# Altium PCB PCB1.PcbDoc
Units mm, origin at the board's own origin, x right, y up, seen from the top; angles counter-clockwise.
Board outline 50 x 35 mm, 4 copper layers (Top Layer, Internal Plane 1, Internal Plane 2, Bottom Layer), stack 1.07 mm thick; 19 components, 15 nets, 55 pads, 0 vias.
Unrouted connection lines stored in the file: 1.
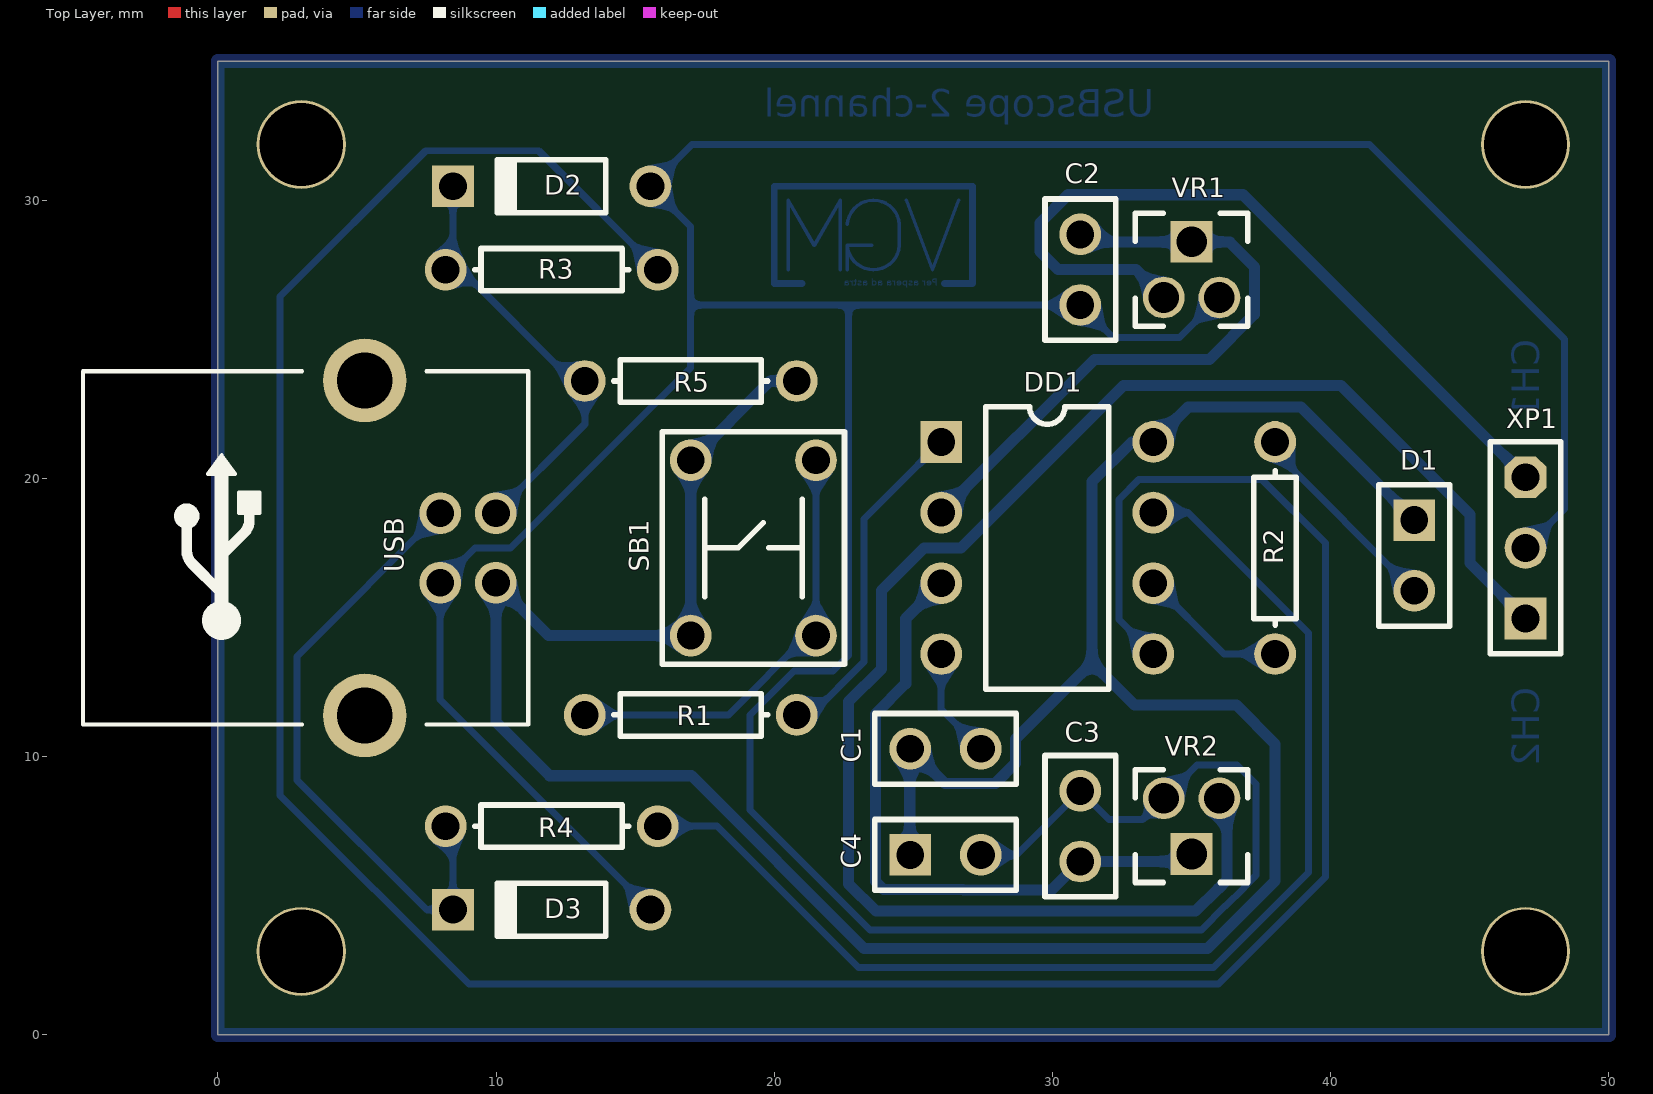
[diagram p0: Top Layer view]
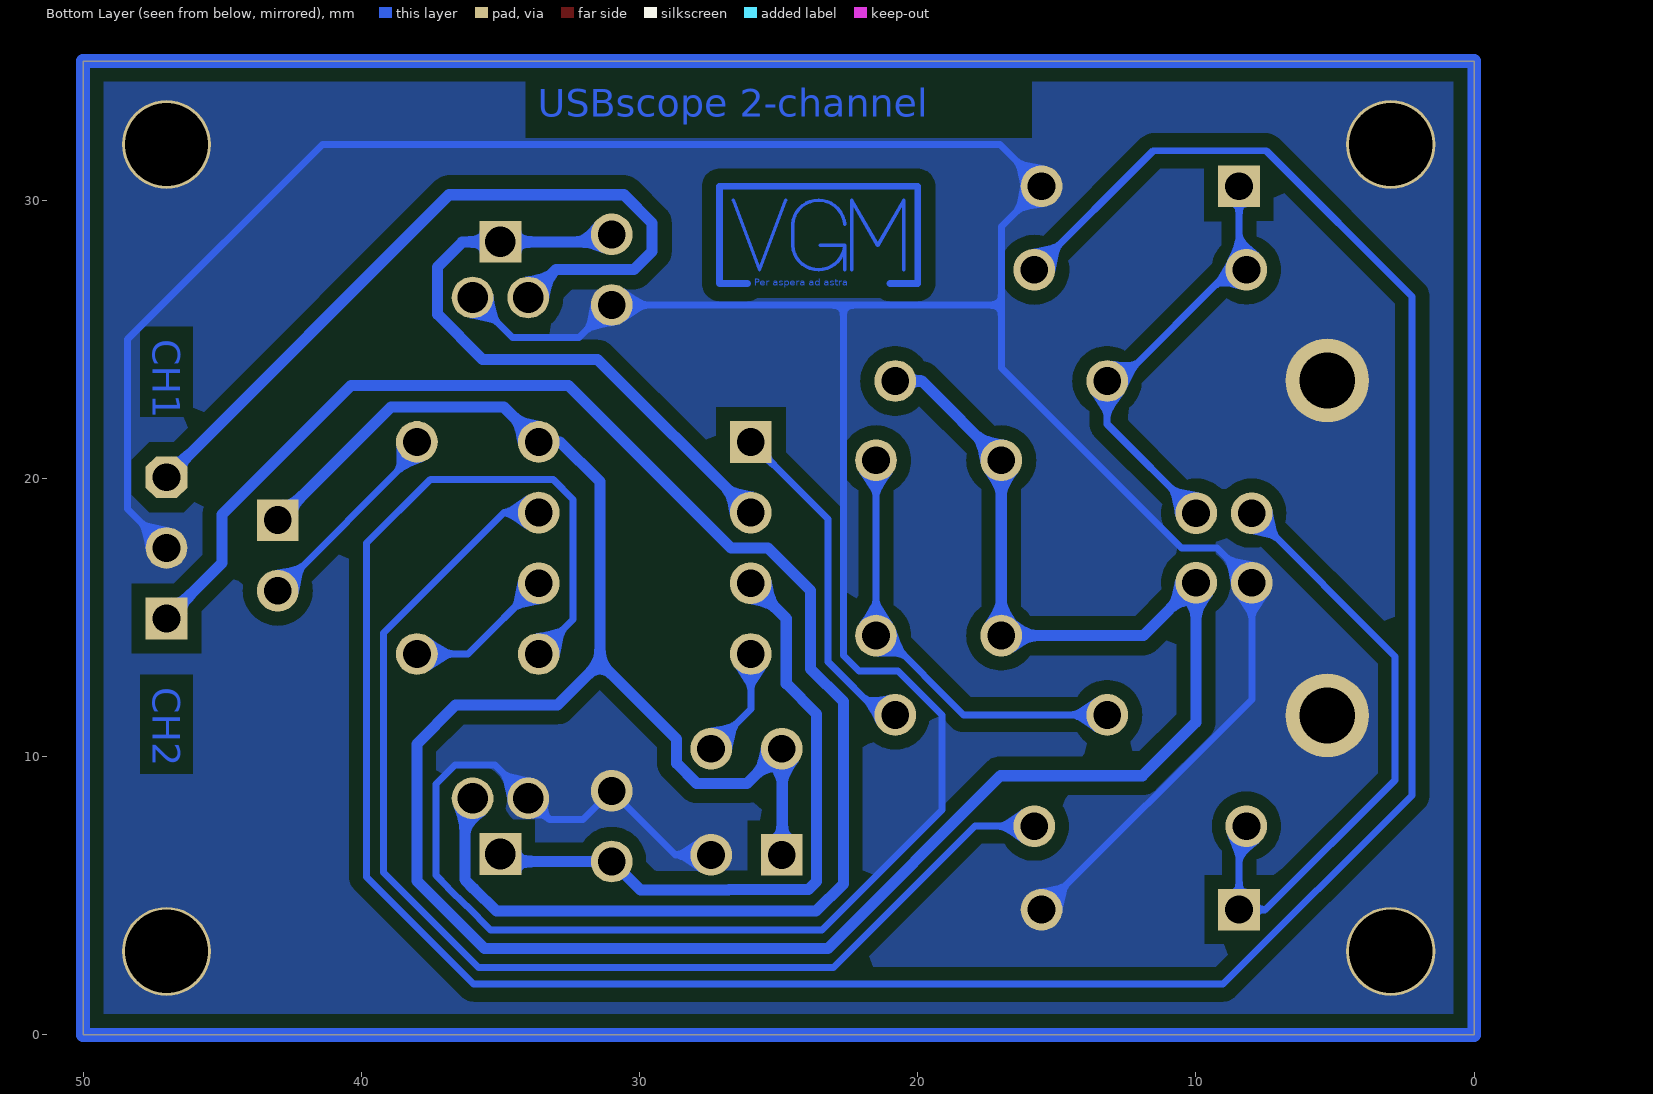
[diagram p1: Bottom Layer view, seen from below]
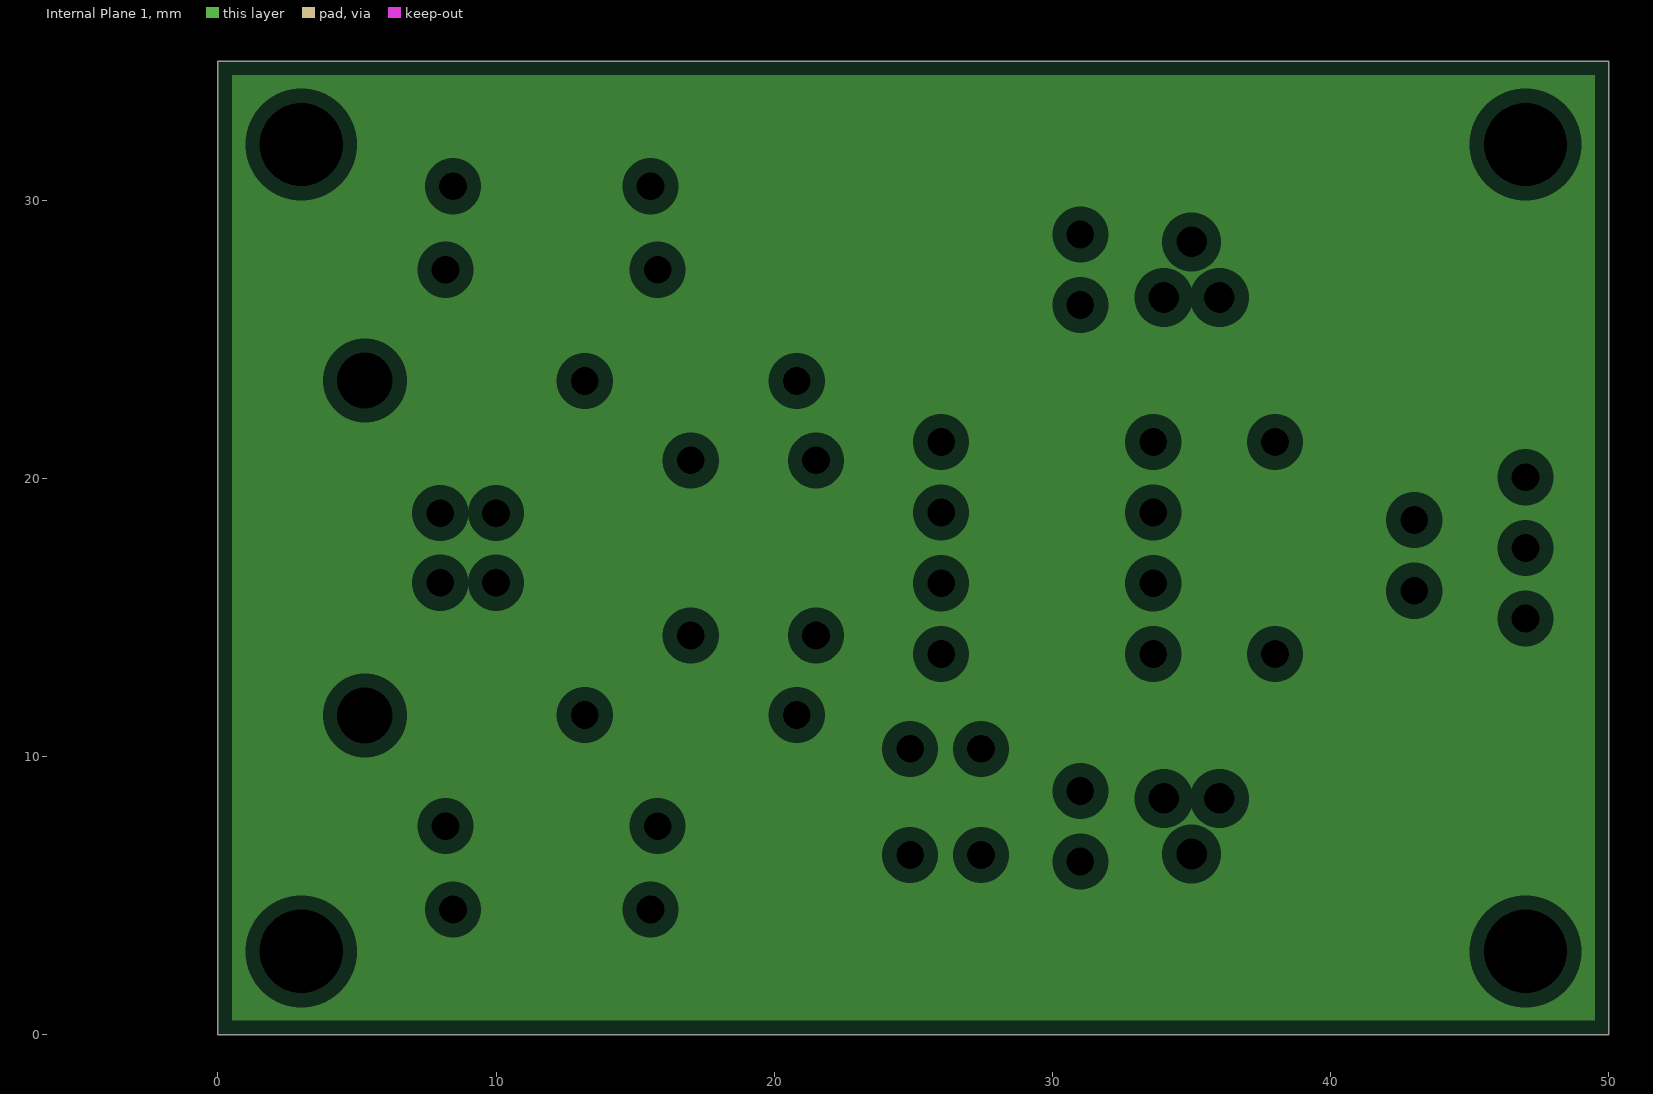
[diagram p2: Internal Plane 1, clearances drawn from the general rule]
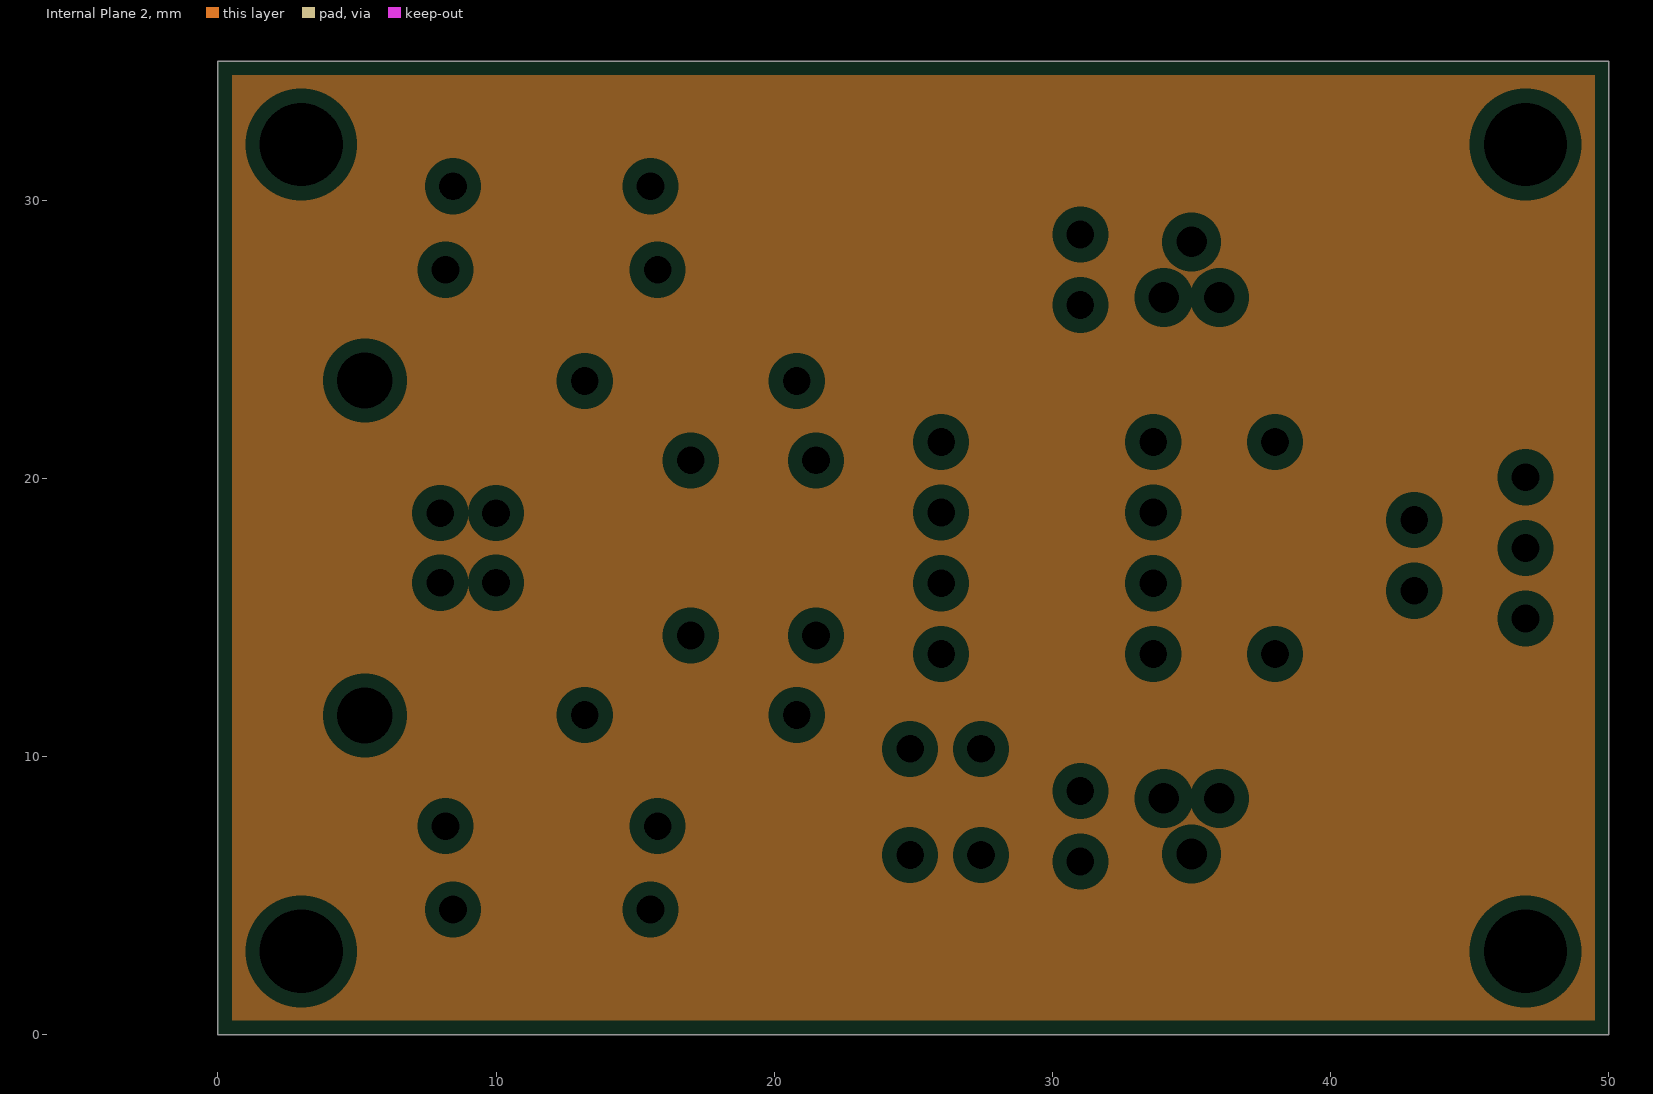
[diagram p3: Internal Plane 2, clearances drawn from the general rule]

## Layer stack, top to bottom
Top Solder: solder mask 0.01, Solder Resist, Dk 3.5
Top Layer: signal copper 0.035
Internal Plane 1: plane copper (thickness not stored)
Internal Plane 2: plane copper (thickness not stored)
Dielectric 1: dielectric 1, FR-4, Dk 4.8
Bottom Layer: signal copper 0.035
Bottom Solder: solder mask 0.1, Solder Resist, Dk 3.5

## Board outline
0,0 0,35 50,35 50,0

## Design rules (kind name [scope] priority, off if disabled: settings)
Clearance [All] p1: gap=0.3 except(0.5: Poly-Poly SMDPad-Poly Track-Poly Via-Poly Arc-Poly Fill-Poly THPad-Poly)
PlaneClearance [All] p1: clearance=0.508
PlaneConnect [All] p1: planeconnectstyle=Relief reliefexpansion=0.508 reliefentries=4 reliefconductorwidth=0.254 reliefairgap=0.254
PolygonConnect [All] p1: connectstyle=Direct reliefconductorwidth=0.254 reliefentries=4 polygonreliefangle="90 Angle" airgapwidth=0.254
RoutingTopology [All] p1: topology=Horizontal
RoutingVias [All] p1: holewidth=1 width=1.5 viastyle="Through Hole" minholewidth=0.711 minwidth=1.27 maxholewidth=0.711 maxwidth=1.27
SolderMaskExpansion [All] p1: expansion=0.102
UnpouredPolygon [All] p1: allowunpoured=FALSE
Width WidthFat [(InNet('NetVR1_1') OR InNet('NetC2_2') OR InNet('NetC3_2') OR InNet('NetVR2_1')  OR InNet('NetC1_2'))] p1: maxlimit=0.4 minlimit=0.4 preferedwidth=0.4
Width [All] p2: maxlimit=0.5 minlimit=0.25 preferedwidth=0.25 minimp=50.000000 maximp=50.000000 favimp=50.000000
26 further rules are at their usual default settings.

## Classes and differential pairs
component class schematic: C1 C2 C3 C4 D1 D2 D3 DD1 R1 R2 R3 R4 R5 SB1 USB VR1 VR2 XP1

## Components (designator, comment, footprint, x,y, rotation, side; value= is the part's Value field where it differs from the comment)
C1 "100nF" RAD-0.1 26.155,10.28 r180 top
C2 "100nF" RAD-0.1 31,27.5 r90 top
C3 "100nF" RAD-0.1 31,7.5 r270 top
C4 "47uF x 16V" HDR1X2 24.885,6.47 r0 top
D1 "" HDR1X2 43,18.5 r270 top
D2 "Zener" DO-35 12,30.5 r180 top
D3 "Zener" DO-35 12,4.5 r180 top
DD1 "ATtiny85" DIP-8-300 26,21.31 r0 top
R1 "10K" AXIAL-0.3 17,11.5 r180 top
R2 "270" AXIAL-0.3 38,17.5 r90 top
R3 "68" AXIAL-0.3 12,27.5 r180 top
R4 "68" AXIAL-0.3 12,7.5 r180 top
R5 "1K5" AXIAL-0.3 17,23.5 r0 top
SB1 "Button TACT-64K" "BUTTON TACT-64K" 17,14.35 r90 top
USB "USB_TypeB" USB_TypeB 9,17.5 r90 top
VR1 "Potentiometer" POTENTIOMETER 34,26.5 r0 top
VR2 "Potentiometer" POTENTIOMETER 36,8.5 r180 top
XP1 "WF-03R" HDR1X3 47,20.04 r270 top
? "" "LOGO small" 27.125,27 r180 bottom

## Footprints (in the part's own frame and the unit in brackets; to place one, negate y for a bottom-side part, rotate by r counter-clockwise, add the part's x,y. Pads: shape width x height; smd on the part's side, far side on the other; paste and mask are expansions set on the pad)
AXIAL-0.3 [mm] "Axial Device, Thru-Hole; 2 Leads; 0.3 in Pin Spacing"
  round 1.5 hole 1: 1(-3.81,0) 2(3.81,0)
  silkscreen extent -2.77,-0.76 2.77,0.76
"BUTTON TACT-64K" [mm] "My standart switch button"
  round 1.5 hole 1: 1(0,0) 2(6.3,0) 3(0,-4.5) 4(6.3,-4.5)
  silkscreen extent -1.02,-5.53 7.32,1.02, body extent -0.1,-5.25 6.4,0.75, height 4.3
DIP-8-300 [mm]
  rect 1.5x1.5 hole 1: 1(0,0)
  round 1.5 hole 1: 2(0,-2.54) 3(0,-5.08) 4(0,-7.62) 5(7.62,-7.62) 6(7.62,-5.08) 7(7.62,-2.54) 8(7.62,0)
  silkscreen extent 1.6,-8.89 6.02,1.27, body extent -0.13,-8.44 7.75,0.82, height 4
DO-35 [mm] "Diode, Axial; Body 3.8 x 1.9 mm (LxDia. max), Lead Dia. 0.53 mm (max)"
  round 1.5 hole 1: 1(-3.55,0)
  rect 1.5x1.5 hole 1: 2(3.55,0)
  silkscreen extent -1.95,-0.95 2.05,0.95
HDR1X2 [mm] "Connector; Header; 2 Position"
  rect 1.5x1.5 hole 1: 1(0,0)
  round 1.5 hole 1: 2(2.54,0)
  silkscreen extent -1.27,-1.27 3.81,1.27
HDR1X3 [mm] "Connector; Header; 3 Position"
  oct 1.5x1.5 hole 1: 1(0,0)
  round 1.5 hole 1: 2(2.54,0)
  rect 1.5x1.5 hole 1: 3(5.08,0)
  silkscreen extent -1.27,-1.27 6.35,1.27
"LOGO small" [mm] "My logo (7.125x3.5)"
  Top Layer lines w0.125: 6.625,0.5 6.625,3 5.688,1.375 4.75,3 4.75,0.5 ; 4.5,0.5 4.5,1.375 ; 4.5,2.125 ccw(c3.563,2.06) 2.625,2.125 2.625,1.375 ccw(c3.563,1.44) 4.5,1.375 ; 3.625,1.375 4.5,1.375 ; 2.375,3 1.438,0.5 0.5,3
  Top Layer lines w0.25: 6.125,0 7.125,0 7.125,3.5 0,3.5 0,0 1,0
POTENTIOMETER [mm] "Variable Resistor"
  round 1.5 hole 1.1: 1(0,0) 3(2,0)
  rect 1.5x1.5 hole 1.1: 2(1,2)
  silkscreen extent -1.02,-1.02 3.03,3.03, body extent -0.98,-1 3,3, height 4.2
RAD-0.1 [mm] "Radial Cap, Thru-Hole; 2 Leads; 0.1 in Pin Spacing"
  round 1.5 hole 1: 1(-1.27,0) 2(1.27,0)
  silkscreen extent -2.54,-1.27 2.54,1.27
USB_TypeB [mm]
  round 1.5 hole 1 mask+0.025: 1(-1.25,-0.995) 2(1.25,-0.995) 3(1.25,1.005) 4(-1.25,1.005)
  round 3 hole 2 mask+0: ""(-6.02,3.715) ""(6.02,3.715)
  silkscreen extent -6.35,-2.16 6.35,13.84, body extent -7.19,-1.7 7.19,14, height 11.5

## Part data
C1 C2 C3: library part Cap, "Capacitor"
C4: library part "Cap Pol1", "Polarized Capacitor (Radial)"
D1: library part LED1, "Typical RED GaAs LED"
D2 D3: library part "D Zener", "Zener Diode"
DD1: "8-bit AVR MCU"
R1 R2 R3 R4 R5: library part Res1, "Resistor"
SB1: "My standart switch button"
USB: "USB"
XP1: library part "Header 3", "Header, 3-Pin"

## Free pads (board coordinates)
  round 3.2 hole 3: ""(3,3) ""(3,32) ""(47,3) ""(47,32)

## Nets (pads, with @x,y where several pads share a name; then routed paths per layer and width w, separated by ;. In a path a pad name is that pad's centre, name@x,y a point inside that pad or via, vN(x,y) a via of type N, cw(c..) or ccw(c..) an arc to the next point about the centre after c; other vN are vias at no path point)
NetC1_1: C1.1 DD1.4 | length 4
  Bottom Layer w0.25: DD1.4 26,11.705 C1.1
NetC1_2: C1.2 C4.1 D1.1 DD1.8 R5.2 SB1.1 SB1.2 USB.1 | length 103.3
  Bottom Layer w0.4: R5.2 19.85,23.5 SB1.2 SB1.1 11.895,14.35 USB.1 9.995,11.237 11.916,9.315 17.019,9.315 23.234,3.1 35.575,3.1 38.002,5.527 38.002,10.458 36.605,11.855 32.948,11.855 31.424,13.379 ; C4.1 24.87,6.485 24.87,10.265 C1.2 26.135,9.03 27.943,9.03 28.675,9.762 28.675,10.63 31.424,13.379 ; D1.1 38.931,22.569 34.879,22.569 DD1.8 32.852,21.31 31.424,19.881 31.424,13.379
NetC2_1: C2.1 C3.1 C4.2 D2.1 D3.1 pad. USB. USB.4 VR1.3 VR2.3 XP1.2 | length 158.4
  Bottom Layer w0.25: D3.1 7.995,12.055 USB.4 9.238,17.494 10.519,17.494 16.996,23.971 16.996,29.054 ; 22.675,26.23 22.675,13.637 22.112,13.074 20.702,13.074 19.13,11.502 19.13,8.088 23.443,3.775 35.354,3.775 36.204,4.625 36.216,4.625 36.875,5.284 36.875,5.296 37.316,5.737 37.316,9.01 36.631,9.696 35.196,9.696 33.24,7.74 32.03,7.74 C3.1 28.7,6.47 C4.2 ; VR1.3 34.563,25.063 32.167,25.063 C2.1 16.996,26.23 16.996,29.054 ; XP1.2 48.4,18.9 48.4,25.001 41.401,32 17.05,32 D2.1 16.996,29.054
NetC2_2: C2.2 DD1.2 VR1.2 | length 22.7
  Bottom Layer w0.4: DD1.2 31.505,24.275 35.64,24.275 37.266,25.901 37.266,27.603 36.368,28.5 VR1.2 31.55,28.5 31.28,28.77 C2.2
NetC3_2: C3.2 DD1.3 VR2.2 | length 23.7
  Bottom Layer w0.4: DD1.3 24.725,14.955 24.725,12.62 23.635,11.53 23.635,5.513 23.928,5.22 26.781,5.22 26.801,5.2 29.97,5.2 C3.2 34.73,6.23 VR2.2
NetD1_2: D1.2 R2.2 | length 7.4
  Bottom Layer w0.25: R2.2 38,20.96 D1.2
NetD2_2: D2.2 R3.2 R5.1 USB.2 | length 15.8
  Bottom Layer w0.25: D2.2 8.45,27.76 R3.2 8.75,27.5 12.75,23.5 R5.1 13.19,21.945 USB.2
NetD3_2: D3.2 R4.2 USB.3 | length 22.4
  Bottom Layer w0.25: USB.3 2.849,13.604 2.849,9.151 7.5,4.5 D3.2 8.45,7.24 R4.2
NetDD1_1: DD1.1 R1.1 | length 12.3
  Bottom Layer w0.25: R1.1 21.316,11.5 23.225,13.409 23.225,18.535 DD1.1
NetDD1_5: DD1.5 R3.1 | length 104.1
  Bottom Layer w0.25: R3.1 11.535,31.775 7.475,31.775 2.239,26.539 2.239,8.61 9.024,1.825 35.961,1.825 39.806,5.669 39.806,17.671 37.52,19.957 33.1,19.957 32.389,19.246 32.389,14.921 DD1.5
NetDD1_6: DD1.6 R2.1 | length 5.4
  Bottom Layer w0.25: DD1.6 36.16,13.69 R2.1
NetDD1_7: DD1.7 R4.1 | length 42.9
  Bottom Layer w0.25: R4.1 17.95,7.5 23.025,2.425 35.784,2.425 39.196,5.837 39.196,14.446 34.872,18.77 DD1.7
NetR1_2: R1.2 SB1.3 SB1.4 | length 15.8
  Bottom Layer w0.25: R1.2 18.35,11.5 21.2,14.35 SB1.3 SB1.4
NetVR1_1: VR1.1 XP1.1 | length 28.2
  Bottom Layer w0.4: VR1.1 32.999,27.501 30.199,27.501 29.55,28.15 29.55,29.184 30.56,30.194 36.846,30.194 XP1.1
NetVR2_1: VR2.1 XP1.3 | length 59.4
  Bottom Layer w0.4: VR2.1 36.275,8.5 36.275,5.579 36.25,5.554 36.25,5.543 35.957,5.25 35.946,5.25 35.146,4.45 23.652,4.45 22.675,5.427 22.675,11.975 23.85,13.15 23.85,15.965 25.378,17.494 26.705,17.494 32.547,23.336 40.372,23.336 45,18.707 45,16.96 XP1.3
copper on no net: | length 170
  Bottom Layer w0.5: 0,0 0,35 50,35 50,0 0,0

## Polygon pours and split planes (outlines as drawn)
NetC2_1 on Bottom Layer "GND" (solid, remove dead copper, pour order 2): 0,0 50,0 50,35 0,35

## Other copper
Bottom Layer:
  text "USBscope 2-channel" at 33.664,33 h1
  text "CH1" at 47.5,25 h1 r90
  text "CH2" at 47.5,12.5 h1 r90

## Silkscreen, mask and mechanical layers (free items; w line width, h text height)
Mechanical 5:
  circle w0.125: c6,35 r3
  circle w0.125: c15,35 r2.5
  circle w0.125: c15,0 r1.5
  circle w0.125: c6,0 r1.5
  circle w0.125: c6,35 r1.5
  circle w0.125: c15,35 r1.5
  circle w0.125: c74,35 r1.5
  circle w0.125: c65,35 r1.5
  circle w0.125: c74,0 r1.5
  circle w0.125: c65,0 r1.5
  circle w0.125: c15,0 r2.5
  circle w0.125: c6,0 r3
  circle w0.125: c65,35 r2.5
  circle w0.125: c74,35 r3
  circle w0.125: c65,0 r2.5
  circle w0.125: c74,0 r3
  lines w0.1: 0.3,-4 79.7,-4 ; 0.35,-4 -1.45,-2.75 -1.45,37.75 0.3,39 79.7,39 81.5,37.75 81.5,-2.75 79.75,-4 ; 30.5,17.5 49.5,17.5 ; 40,8 40,27 ; -5,-7.5 85,-7.5 85,42.5 -5,42.5 -5,-7.5
Mechanical 9:
  lines w0.1: 0,-25 0,0 ; 0,-20.254 0,-19.746 ; 1.524,-20.508 0,-20 ; 1.524,-19.492 0,-20 ; 3,-15 3,3 ; 3,-10.254 3,-9.746 ; 4.524,-10.508 3,-10 ; 4.524,-9.492 3,-10 ; 19.896,-20 0,-20 ; 19.896,-10 3,-10 ; 30.104,-20 50,-20 ; 30.104,-10 47,-10 ; 45.476,-10.508 47,-10 ; 45.476,-9.492 47,-10 ; 47,-15 47,3 65,3 ; 47,-10.254 47,-9.746 ; 47,32 65,32 ; 48.476,-20.508 50,-20 ; 48.476,-19.492 50,-20 ; 50,-25 50,0 75,0 ; 50,-20.254 50,-19.746 ; 50,35 75,35 ; 59.492,4.524 60,3 ; 59.492,30.476 60,32 ; 59.746,3 60.254,3 ; 59.746,32 60.254,32 ; 60,12.396 60,3 ; 60,22.604 60,32 ; 60.508,4.524 60,3 ; 60.508,30.476 60,32 ; 69.492,1.524 70,0 ; 69.492,33.476 70,35 ; 69.746,0 70.254,0 ; 69.746,35 70.254,35 ; 70,12.396 70,0 ; 70,22.604 70,35 ; 70.508,1.524 70,0 ; 70.508,33.476 70,35
  text "29 (mm)" at 60.914,12.65 h1.52 r90
  text "35 (mm)" at 70.914,12.65 h1.52 r90
  text "44 (mm)" at 20.15,-10.914 h1.52
  text "50 (mm)" at 20.15,-20.914 h1.52

## Text inside footprints (layer, text, board x,y; h text height)
?: Bottom Layer "Per aspera ad astra" at 25.874,26.917 h0.25